# Altium PCB PCB.pcbdoc
Units mm, origin at the board's own origin, x right, y up, seen from the top; angles counter-clockwise.
Board outline 109.98 x 65.02 mm, 2 copper layers (Top Layer, Bottom Layer); 32 components, 40 nets, 110 pads, 0 vias.
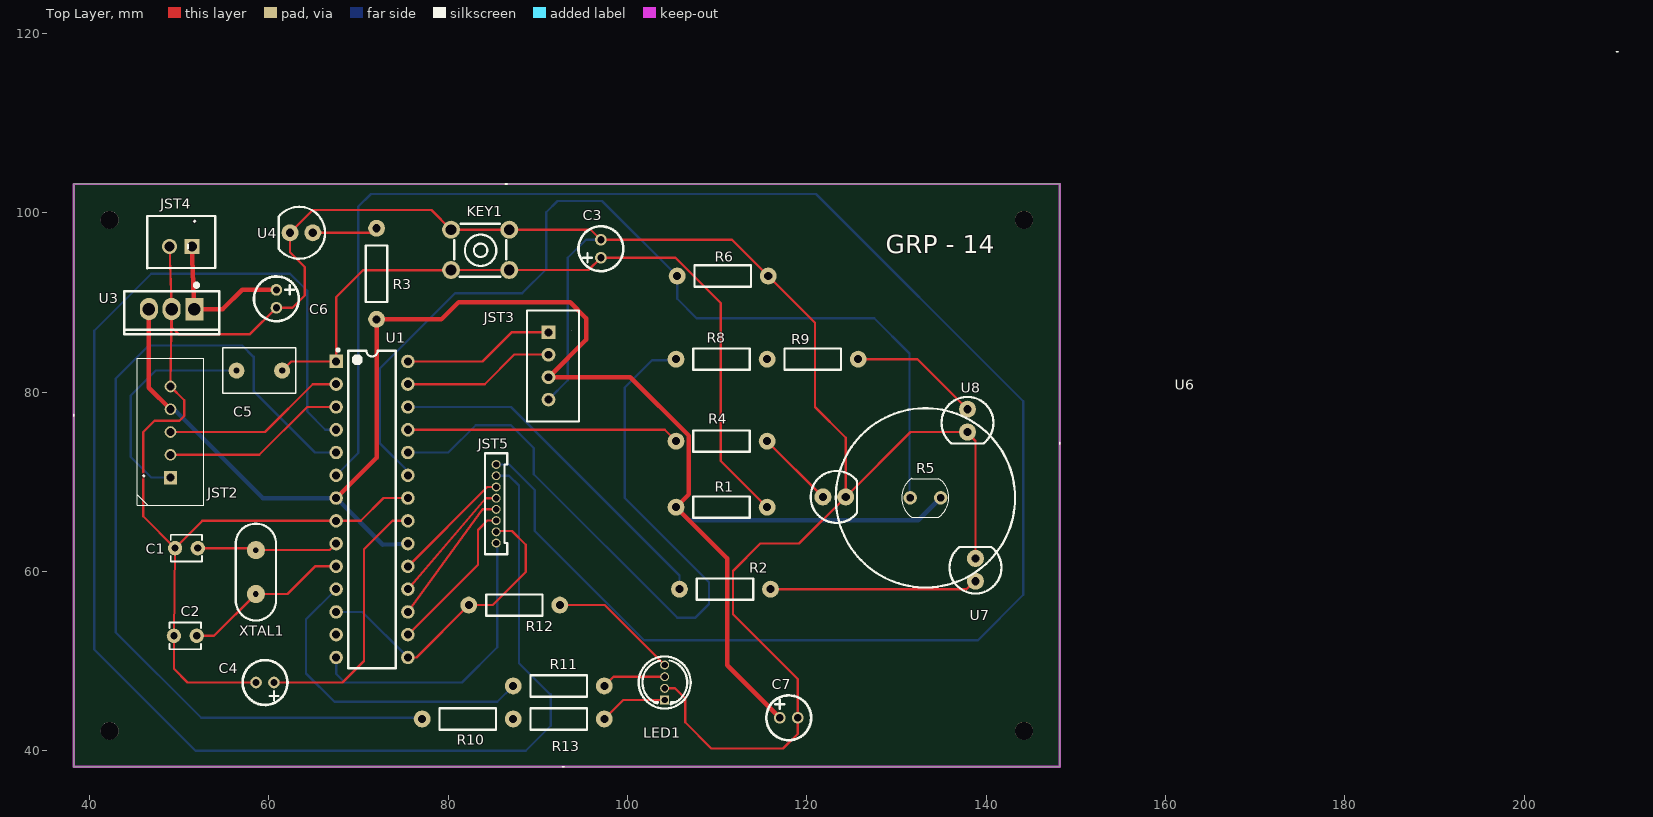
[diagram p0: Top Layer view]
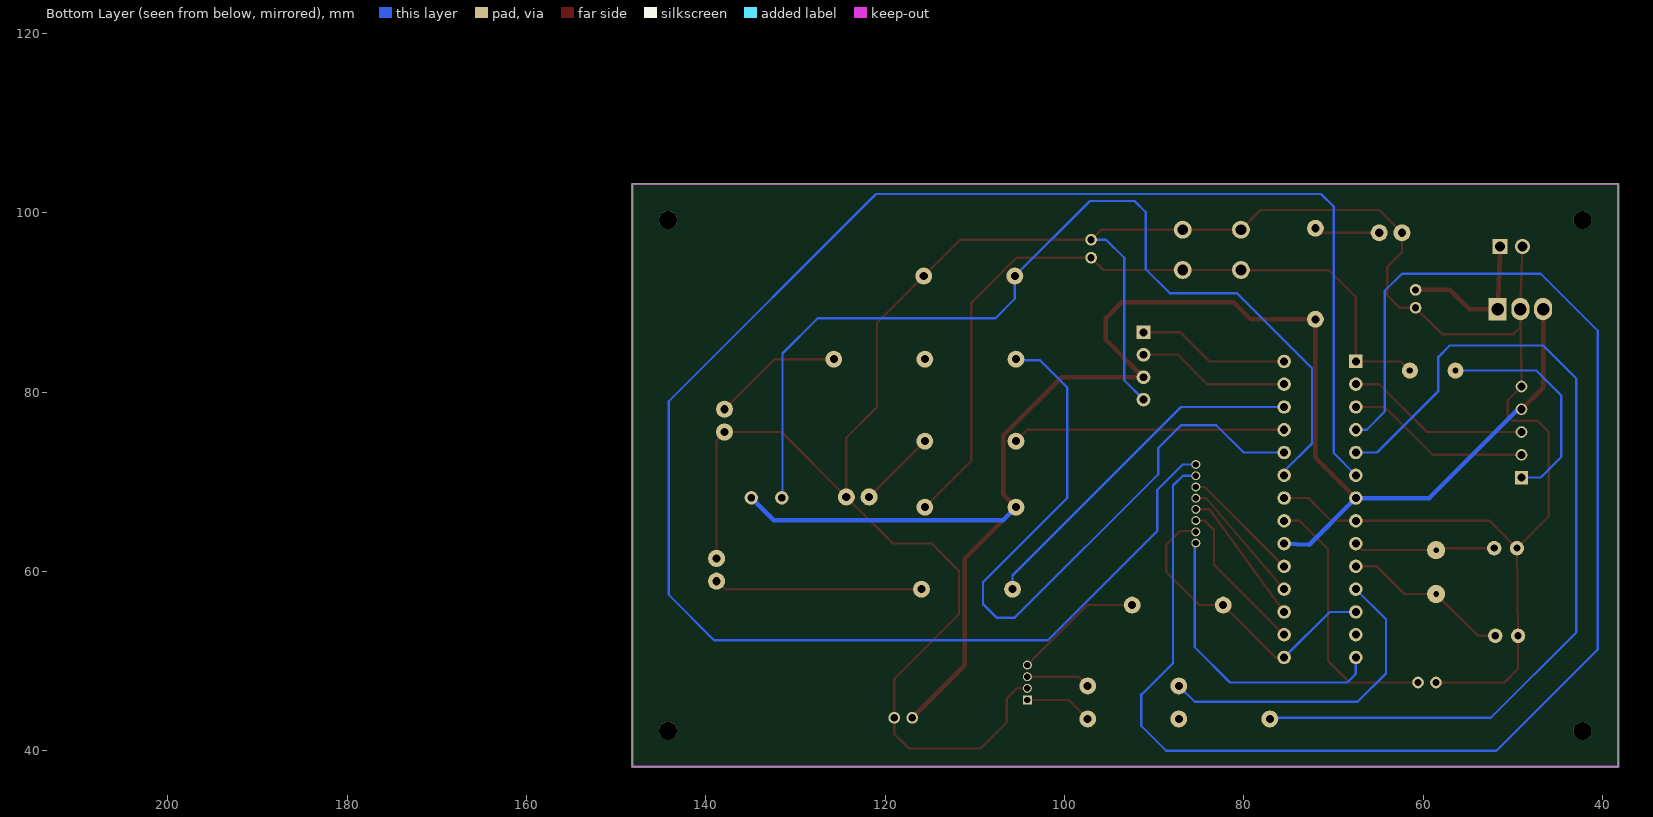
[diagram p1: Bottom Layer view, seen from below]

## Layer stack, top to bottom
Top Solder: solder mask 0.0102, Solder Resist, Dk 3.5
Top Layer: signal copper 0.0356
Dielectric1: dielectric 0.32, FR-4, Dk 4.8
Bottom Layer: signal copper 0.0356
Bottom Solder: solder mask 0.0102, Solder Resist, Dk 3.5

## Board outline
148.209,38.227 38.227,38.227 38.227,103.251 148.209,103.251

## Design rules (kind name [scope] priority, off if disabled: settings)
Clearance [All] p1: gap=0.254 ignorepadtopadclearanceinfootprint=FALSE except(0: Arc-Hole Track-Hole SMDPad-Hole THPad-Hole Via-Hole Fill-Hole Poly-Hole Region-Hole Text-Hole)
PolygonConnect [All] p1: connectstyle=Relief reliefconductorwidth=0.254 reliefentries=4 polygonreliefangle="90 Angle" airgapwidth=0.254
RoutingVias [All] p1: holewidth=0.711 width=1.27 viastyle="Through Hole" minholewidth=0.711 minwidth=1.27 maxholewidth=0.711 maxwidth=1.27
SolderMaskExpansion [All] p1: expansion=0.102 istentingtop=FALSE
Width [All] p1: maxlimit=0.254 minlimit=0.254 preferedwidth=0.254
Width Width_1 [InNet('VCC')] p2: maxlimit=5 minlimit=5 preferedwidth=5
Width Width2 [InNet('5V')] p3: maxlimit=5 minlimit=5 preferedwidth=5
30 further rules are at their usual default settings.

## Components (designator, comment, footprint, x,y, rotation, side; value= is the part's Value field where it differs from the comment)
C1 "22pF" CAP-TH_L3.5-W3.0-P2.54-D0.8 50.8,62.611 r0 top
C2 "22pF" CAP-TH_L3.5-W3.0-P2.54-D0.8 50.673,52.832 r0 top
C3 "100nF" CAP-TH_BD5.0-P2.00-D0.8-FD 97.028,96.012 r90 top
C4 "100nF" CAP-TH_BD5.0-P2.00-D0.8-FD 59.563,47.625 r180 top
C5 "100nF" RAD-0.2 58.928,82.423 r0 top
C6 "330nF" CAP-TH_BD5.0-P2.00-D0.8-FD 60.833,90.424 r270 top
C7 "100nF" CAP-TH_BD5.0-P2.00-D0.8-FD 117.983,43.688 r0 top
JST2 "FTDI" "JST 2.54MM MALE 5 PIN CONNECTOR" 49.022,75.565 r90 top
JST3 "JST_4 PIN" JST_XH_4_PIN_TOP_ENTRY 91.186,82.931 r0 top
JST4 "POWER" CONN-TH_XHB-2A 50.165,96.266 r0 top
JST5 "Keypad" 1X08-1.25MM_JST 85.344,67.564 r90 top
KEY1 "RST_BTN" KEY-TH_4P-L6.0-W6.0-P4.50 83.566,95.885 r180 top
LED1 "φ5 RGB Transparent" LED-TH_4P-BD5.8-P1.30 104.14,47.625 r270 top
R1 "10K" AXIAL-0.4 110.49,67.183 r180 top
R2 "330Ω" AXIAL-0.4 110.871,58.039 r0 top
R3 "330Ω" AXIAL-0.4 72.009,93.218 r90 top
R4 "330Ω" AXIAL-0.4 110.49,74.549 r0 top
R5 "LDR07" RESISTOR_LDR_5.1X4.3_RM3.4 133.227,68.227 r0 top
R6 "1K" AXIAL-0.4 110.617,92.964 r0 top
R8 "330Ω" AXIAL-0.4 110.49,83.693 r0 top
R9 "330Ω" AXIAL-0.4 120.65,83.693 r0 top
R10 "330Ω" AXIAL-0.4 82.169,43.561 r0 top
R11 "330Ω" AXIAL-0.4 92.329,47.244 r0 top
R12 "330Ω" AXIAL-0.4 87.376,56.261 r0 top
R13 "330Ω" AXIAL-0.4 92.329,43.561 r0 top
U1 "ATMEGA _328P-PU" DIP-28_L34.6-W7.3-P2.54-LS10.2-BL 71.501,66.929 r270 top
U3 "7805_Regulator" TO-220-3_L10.0-W4.5-P2.54-L 49.149,89.281 r180 top
U4 "LED" "5MM LED" 64.897,97.79 r180 top
U6 "GREEN_LED" "5MM LED" 121.793,68.326 r0 top
U7 "BLUE_LED" "5MM LED" 138.811,58.928 r90 top
U8 "RED_LED" "5MM LED" 137.922,78.105 r270 top
XTAL1 "16MHz" "16MHZ_OSC [PCB]" 58.547,59.944 r0 top

## Footprints (in the part's own frame and the unit in brackets; to place one, negate y for a bottom-side part, rotate by r counter-clockwise, add the part's x,y. Pads: shape width x height; smd on the part's side, far side on the other; paste and mask are expansions set on the pad)
1X08-1.25MM_JST [mm]
  round 1 hole 0.701: 1(-4.382,0) 2(-3.132,0) 3(-1.878,0) 4(-0.626,0) 5(0.626,0) 6(1.878,0) 7(3.13,0) 8(4.382,0)
  silkscreen extent -5.63,-1.25 5.63,1.25
"5MM LED" [mm]
  round 1.9 hole 0.914: 1(0,0) 2(2.54,0)
  silkscreen extent -1.37,-2.9 3.81,2.9
"16MHZ_OSC [PCB]" [mil]
  round 80 hole 25: 1(0,96.46) 2(0,-96.46)
  silkscreen extent -88,-212 88,212
AXIAL-0.4 [mil]
  round 74 hole 35.4: 1(-200,0) 2(200,0)
  silkscreen extent -124,-47 124,47
CAP-TH_BD5.0-P2.00-D0.8-FD [mm]
  round 1.3 hole 0.8: 1(-1,0) 2(1,0)
  silkscreen extent -2.5,-2.5 2.5,2.5
CAP-TH_L3.5-W3.0-P2.54-D0.8 [mm]
  round 1.6 hole 0.8: 1(-1.27,0) 2(1.27,0)
  silkscreen extent -1.75,-1.5 1.75,1.5
CONN-TH_XHB-2A [mm]
  rect 1.7x1.7 hole 1.1: 1(1.251,0)
  round 1.7 hole 1.1: 2(-1.251,0)
  silkscreen extent -3.75,-2.42 3.86,3.4
DIP-28_L34.6-W7.3-P2.54-LS10.2-BL [mm]
  rect 1.5x1.5 hole 0.9: 1(-16.51,-4)
  round 1.5 hole 0.9: 2(-13.97,-4) 3(-11.43,-4) 4(-8.89,-4) 5(-6.35,-4) 6(-3.81,-4) 7(-1.27,-4) 8(1.27,-4) 9(3.81,-4) 10(6.35,-4) 11(8.89,-4) 12(11.43,-4) 13(13.97,-4) 14(16.51,-4) 15(16.51,4) 16(13.97,4) 17(11.43,4) 18(8.89,4) 19(6.35,4) 20(3.81,4) 21(1.27,4) 22(-1.27,4) 23(-3.81,4) 24(-6.35,4) 25(-8.89,4) 26(-11.43,4) 27(-13.97,4) 28(-16.51,4)
  silkscreen extent -17.94,-3.95 17.7,2.65
"JST 2.54MM MALE 5 PIN CONNECTOR" [mm]
  rect 1.5x1.5 hole 0.9: 1(-5.08,0)
  round 1.3 hole 0.9: 2(-2.54,0) 3(0,0) 4(2.54,0) 5(5.08,0)
  silkscreen extent -8.17,-3.68 8.21,3.68
JST_XH_4_PIN_TOP_ENTRY [mil]
  rect 60x60 hole 34.25: 1(0,147.6)
  round 60 hole 34.25: 2(0,49.21) 3(0,-49.21) 4(0,-147.64)
  silkscreen extent -94,-244 134,244
KEY-TH_4P-L6.0-W6.0-P4.50 [mm]
  round 2 hole 1.2: 1(-3.25,-2.25) 2(3.25,-2.25) 3(3.25,2.25) 4(-3.25,2.25)
  silkscreen extent -2.9,-2.9 2.9,3
LED-TH_4P-BD5.8-P1.30 [mm]
  rect 1x1 hole 0.7: 1(1.95,0)
  round 1 hole 0.7: 2(0.65,0) 3(-0.65,0) 4(-1.95,0)
  silkscreen extent -2.9,-2.9 2.9,2.9
RAD-0.2 [mil]
  round 70 hole 28: 1(100,0) 2(-100,0)
  silkscreen extent -160,-100 160,100
RESISTOR_LDR_5.1X4.3_RM3.4 [mm]
  round 1.5 hole 0.8 slot 0.805 at 0 deg: 1(-1.7,0) 2(1.701,0)
  silkscreen extent -2.65,-2.15 2.62,2.17
TO-220-3_L10.0-W4.5-P2.54-L [mm]
  rect 2x2.5 hole 1.4: 1(-2.54,0)
  oval 2x2.5 hole 1.4: 2(0,0) 3(2.54,0)
  silkscreen extent -5.3,-2.86 5.3,2.8

## Free pads (board coordinates)
  round 2 hole 2 unplated: ""(42.227,42.227) ""(42.227,99.227) ""(144.227,42.227) ""(144.227,99.227)

## Nets (pads, with @x,y where several pads share a name; then routed paths per layer and width w, separated by ;. In a path a pad name is that pad's centre, name@x,y a point inside that pad or via, vN(x,y) a via of type N, cw(c..) or ccw(c..) an arc to the next point about the centre after c; other vN are vias at no path point)
1: JST5.5 U1.18 | length 14.5
  Top Layer w0.254: U1.18 84.191,68.189 JST5.5
2: JST5.6 U1.19 | length 13.5
  Top Layer w0.254: U1.19 84.364,69.442 JST5.6
3: JST5.7 U1.4 | length 168.4
  Bottom Layer w0.254: U1.4 66.294,75.819 64.262,77.851 64.262,91.313 62.357,93.218 46.863,93.218 40.513,86.868 40.513,51.308 51.816,40.005 88.646,40.005 91.44,42.799 91.44,46.355 91.313,46.355 87.884,49.784 87.884,69.596 86.787,70.693 JST5.7
4: JST5.8 U1.6 | length 208.6
  Bottom Layer w0.254: U1.6 69.977,73.215 69.977,100.711 71.374,102.108 121.031,102.108 144.145,78.994 144.145,57.404 139.065,52.324 101.854,52.324 89.662,64.516 89.662,69.088 86.804,71.945 JST5.8
5V: C7.1 JST2.4 JST3.3 R1.2 R3.1 R5.2 U1.7 U1.20 U3.3 | length 186.2
  Top Layer w0.5: U3.3 46.609,80.518 JST2.4 ; U1.7 72.009,72.707 R3.1 79.248,88.138 81.153,90.043 93.599,90.043 95.377,88.265 95.377,85.872 JST3.3@91.42,81.915 ; JST3.3 JST3.3@91.42,81.915 ; C7.1 111.129,49.542 111.129,61.464 R1.2 106.854,68.627 106.854,75.147 100.32,81.681 91.654,81.681 JST3.3@91.42,81.915
  Bottom Layer w0.5: JST2.4 49.403,78.105 59.309,68.199 U1.7 72.707,62.992 U1.20 ; R1.2 106.854,65.739 132.44,65.739 R5.2
A: JST5.1 U1.14 | length 33.1
  Bottom Layer w0.254: U1.14 67.501,48.578 68.453,47.625 81.534,47.625 85.471,51.562 JST5.1@85.471,62.865
B: JST5.2 R12.1 U1.12 U1.15 | length 34.2
  Top Layer w0.254: U1.15 76.454,50.419 R12.1 84.963,56.261 88.646,59.944 88.646,62.992 87.122,64.516 85.428,64.516 JST5.2
  Bottom Layer w0.254: U1.12 70.421,55.499 U1.15
BLUE: R2.1 U1.26 | length 39.6
  Bottom Layer w0.254: U1.26 86.995,78.359 105.791,59.563 R2.1
C: JST5.3 U1.16 | length 17.4
  Top Layer w0.254: U1.16 83.312,60.77 83.312,64.643 84.355,65.686 JST5.3
C5_2: C5.2 JST2.1 | length 25.2
  Bottom Layer w0.254: JST2.1 46.863,70.485 44.577,72.771 44.577,79.629 47.371,82.423 C5.2
D: JST5.4 U1.17 | length 15.7
  Top Layer w0.254: U1.17 82.042,64.516 83.82,66.937 JST5.4@85.344,66.937
G: R11.1 U1.11 | length 36
  Bottom Layer w0.254: U1.11 64.135,54.673 64.135,48.641 67.31,45.466 85.471,45.466 R11.1
GND: C1.1 C2.1 C3.2 C4.2 C6.2 C7.2 JST2.5 JST3.4 JST4.2 KEY1.1 KEY1.2 LED1.2 R6.2 U1.8 U1.22 U3.2 U4.2 U6.2 U7.2 U8.2 | length 312.5
  Top Layer w0.254: JST4.2 U3.2 ; C4.2 50.927,47.625 49.403,49.149 C2.1 C1.1 ; C6.2 62.626,89.423 64.008,90.805 64.008,93.98 62.357,95.631 U4.2 64.897,100.33 78.121,100.33 KEY1.2 KEY1.1 95.905,98.135 C3.2 111.649,97.012 R6.2 120.904,87.757 120.904,78.359 124.333,74.93 U6.2 ; C6.2 57.896,86.487 49.911,86.487 49.149,87.249 U3.2 ; U1.22 72.771,68.199 70.231,65.659 U1.8 52.578,65.659 C1.1 ; LED1.2 105.283,46.99 106.426,45.847 106.426,43.18 109.347,40.259 117.348,40.259 118.984,41.895 C7.2 118.984,48.021 111.76,55.245 111.76,60.071 114.808,63.119 119.126,63.119 U6.2 ; U7.2 138.811,74.572 137.922,75.461 U8.2 131.572,75.565 U6.2 ; U3.2 49.119,87.249 JST2.5 50.546,79.121 50.546,77.343 50.038,76.835 47.244,76.835 45.974,75.565 45.974,66.167 C1.1
  Bottom Layer w0.254: JST3.4 93.345,81.34 93.345,94.996 95.361,97.012 C3.2
GREEN: R4.1 U1.25 | length 30.4
  Top Layer w0.254: U1.25 104.14,75.819 R4.1
LDR: R5.1 R6.1 U1.23 | length 108.4
  Bottom Layer w0.254: U1.23 75.501,71.183 72.39,74.295 72.39,82.677 80.772,91.059 88.265,91.059 90.932,93.726 90.932,100.076 92.202,101.346 97.155,101.346 R6.1 105.537,90.424 107.696,88.265 127.508,88.265 131.445,84.328 131.445,68.309 R5.1
R: R10.1 U1.5 | length 99.8
  Bottom Layer w0.254: U1.5 65.151,73.279 58.293,80.137 58.293,83.947 57.023,85.217 46.609,85.217 42.926,81.534 42.926,53.213 52.451,43.688 77.089,43.688 R10.1
R2_2: R2.2 U7.1 | length 23.2
  Top Layer w0.254: R2.2 137.818,58.039 138.707,58.928 U7.1
R3_2: R3.2 U4.1 | length 7.3
  Top Layer w0.254: U4.1 71.501,97.79 R3.2
R9_1: R8.2 R9.1
R11_2: LED1.3 R11.2 | length 7.2
  Top Layer w0.254: R11.2 98.44,48.275 LED1.3
R12_2: LED1.4 R12.2 | length 14.5
  Top Layer w0.254: R12.2 97.454,56.261 LED1.4
R13_1: R10.2 R13.1
R13_2: LED1.1 R13.2 | length 7.6
  Top Layer w0.254: R13.2 99.523,45.675 LED1.1
RED: R8.1 U1.24 | length 81.1
  Bottom Layer w0.254: U1.24 80.01,73.279 83.058,76.327 86.995,76.327 89.535,73.787 89.535,70.866 105.537,54.864 107.569,54.864 109.093,56.388 109.093,58.801 99.695,68.199 99.695,80.518 102.743,83.566 105.283,83.566 R8.1
RESET: C3.1 C5.1 KEY1.3 KEY1.4 R1.1 U1.1 | length 85.4
  Top Layer w0.254: C5.1 62.484,83.439 U1.1 67.501,90.615 70.485,93.599 80.28,93.599 KEY1.3 KEY1.4 95.651,93.635 C3.1 ; C3.1 105.357,95.012 110.408,89.961 110.408,72.345 R1.1
RX: JST2.3 U1.2 | length 20.7
  Top Layer w0.254: JST2.3 59.563,75.565 64.897,80.899 U1.2
S$17: 
S$1303: 
S$1308: 
S$1310: 
S$1312: 
SCL: JST3.1 U1.28 | length 17
  Top Layer w0.254: U1.28 83.82,83.439 87.061,86.68 JST3.1
SDA: JST3.2 U1.27 | length 17.1
  Top Layer w0.254: U1.27 84.074,80.899 87.376,84.201 JST3.2
TX: JST2.2 U1.3 | length 20.7
  Top Layer w0.254: JST2.2 58.928,73.025 64.262,78.359 U1.3
U1_9: C1.2 U1.9 XTAL1.1 | length 15.8
  Top Layer w0.254: C1.2 58.33,62.611 XTAL1.1 66.776,62.394 U1.9
U1_10: C2.2 U1.10 XTAL1.2 | length 18.8
  Top Layer w0.254: C2.2 53.885,52.832 XTAL1.2 62.066,57.494 65.151,60.579 U1.10
U1_21: C4.1 U1.21 | length 29.7
  Top Layer w0.254: C4.1 68.199,47.625 70.612,50.038 70.612,62.484 73.787,65.659 U1.21
U6_1: R4.2 U6.1 | length 8.8
  Top Layer w0.254: R4.2 U6.1
U8_1: R9.2 U8.1 | length 14.5
  Top Layer w0.254: R9.2 132.334,83.693 U8.1
VCC: C6.1 JST4.1 U3.1 | length 17
  Top Layer w0.5: JST4.1 U3.1 54.864,89.281 57.008,91.425 C6.1
pads on no net: U1.13

## Keep-outs
Keep-Out Layer:
  lines w0.254: 38.227,38.227 148.227,38.227 148.227,103.227 38.227,103.227 38.227,38.227

## Silkscreen, mask and mechanical layers (free items; w line width, h text height)
Top Overlay:
  circle w0.254: c133.227,68.227 r10
  lines w0.2: 38.227,77.343 38.227,77.543 ; 86.36,103.227 86.56,103.227 ; 92.71,38.227 92.91,38.227 ; 148.209,74.222 148.209,74.422 ; 210.312,117.986 210.512,117.986
  text "GRP - 14" at 128.778,95.504 h2.03